# Altium PCB PCB图.PcbDoc
Units mil, origin at the board's own origin, x right, y up, seen from the top; angles counter-clockwise.
Board outline 6000 x 4000 mil, 2 copper layers (Top Layer, Bottom Layer); 32 components, 39 nets, 182 pads, 0 vias.
Unrouted connection lines stored in the file: 107.
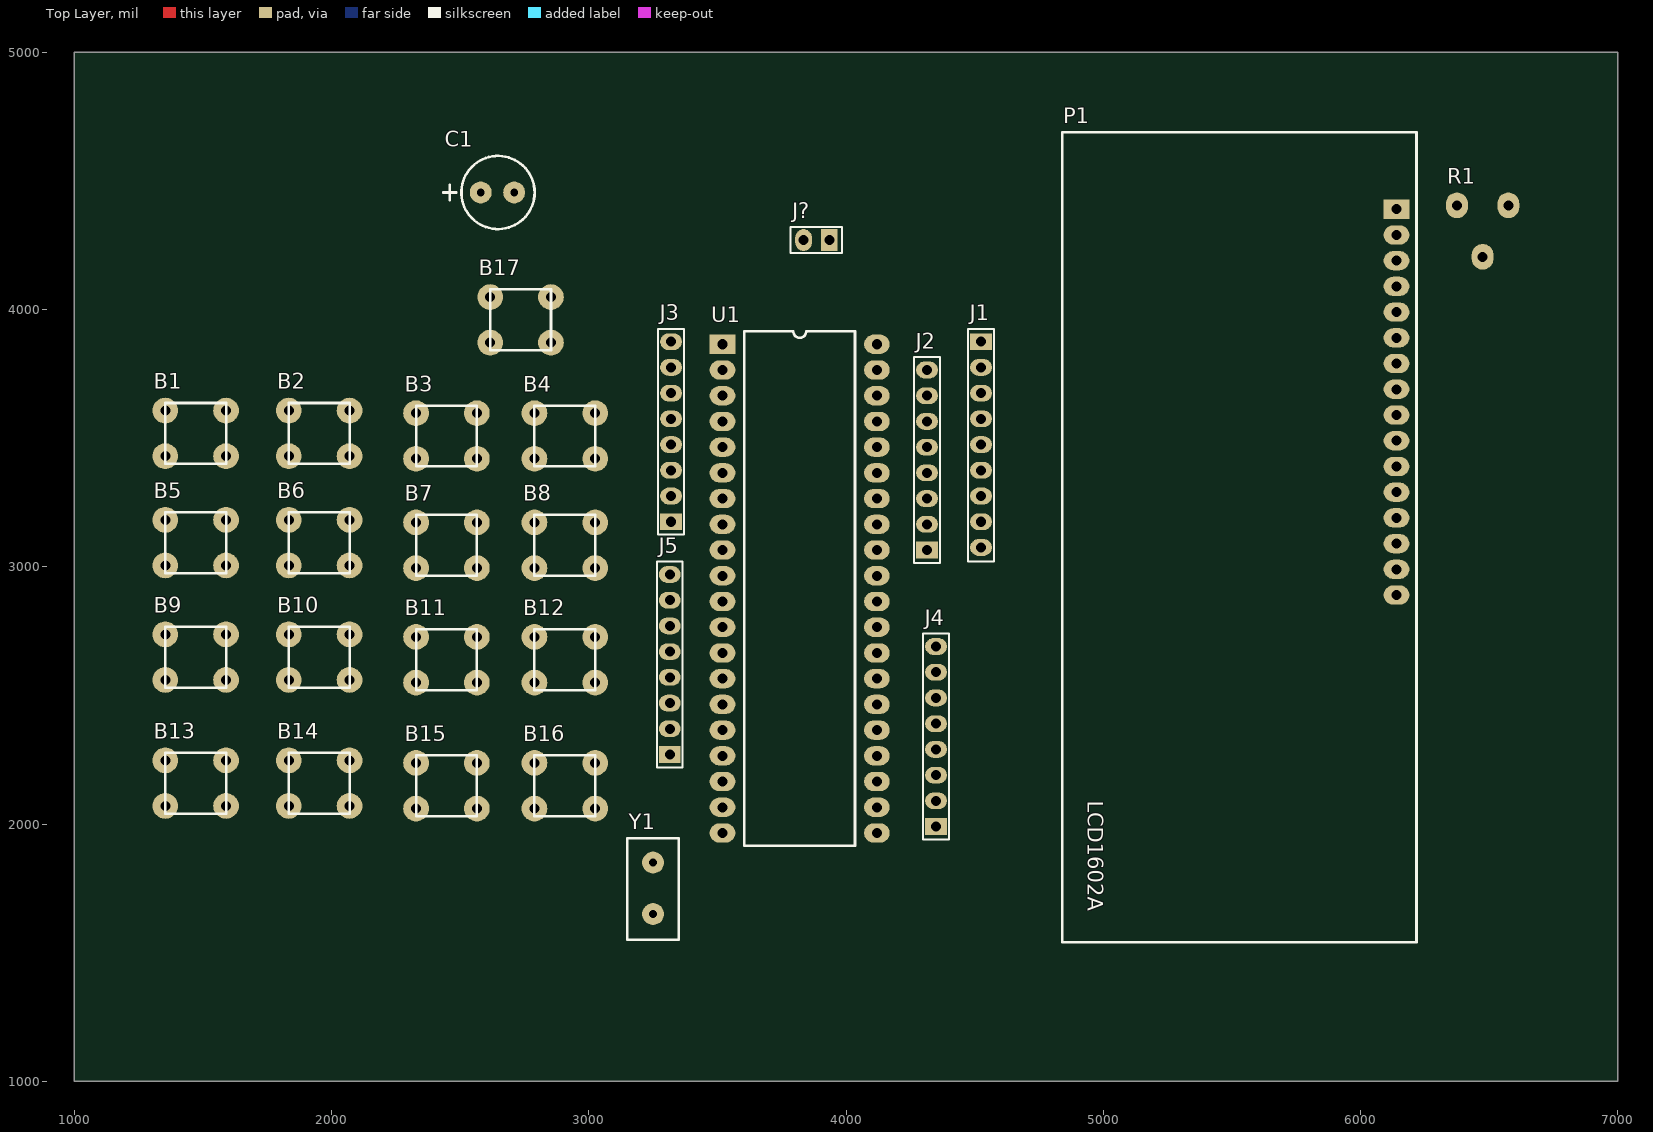
[diagram p0: Top Layer view]
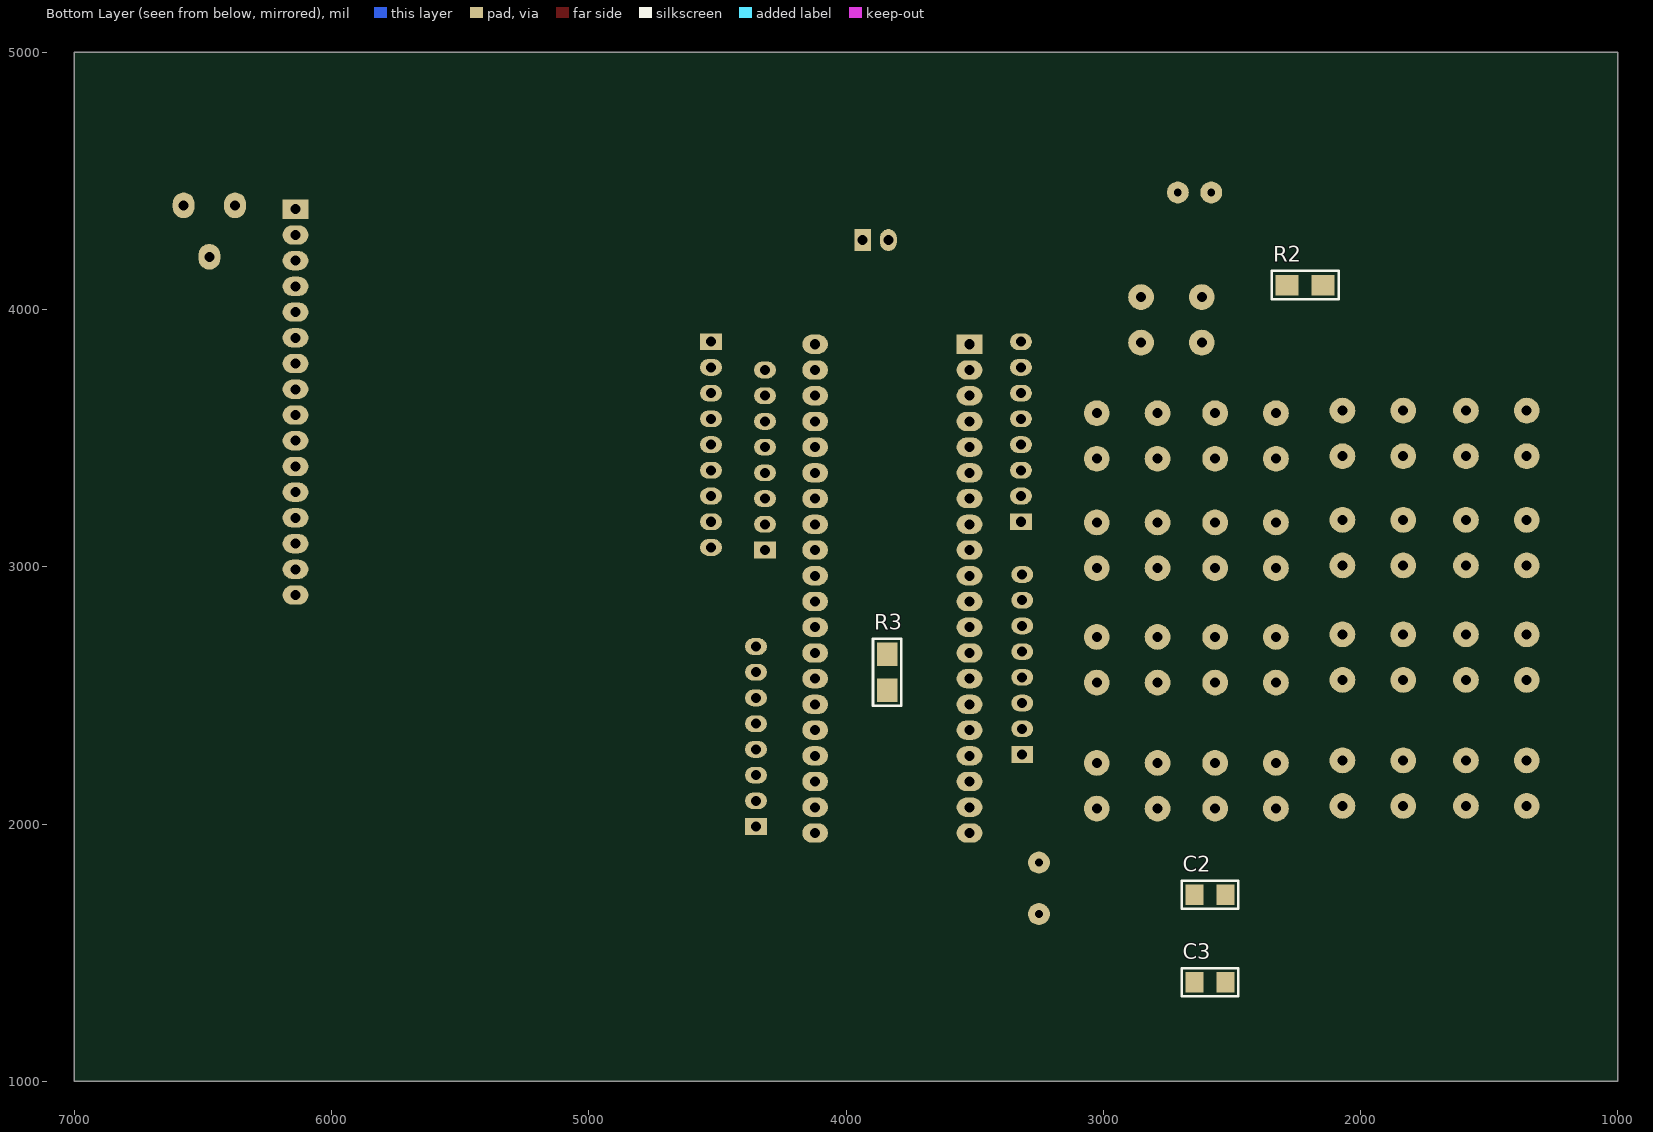
[diagram p1: Bottom Layer view, seen from below]

## Layer stack, top to bottom
Top Solder: solder mask 0.4, Solder Resist, Dk 3.5
Top Layer: signal copper 1.4
Dielectric 1: dielectric 12.6, FR-4, Dk 4.8
Bottom Layer: signal copper 1.4
Bottom Solder: solder mask 0.4, Solder Resist, Dk 3.5

## Board outline
1000,1000 7000,1000 7000,5000 1000,5000

## Design rules (kind name [scope] priority, off if disabled: settings)
Clearance [All] p1: gap=10
PolygonConnect [All] p1: connectstyle=Relief reliefconductorwidth=10 reliefentries=4 polygonreliefangle="90 Angle" airgapwidth=10
RoutingVias [All] p1: holewidth=28 width=50 viastyle="Through Hole" minholewidth=28 minwidth=50 maxholewidth=28 maxwidth=50
SolderMaskExpansion [All] p1: expansion=4
Width [All] p1: maxlimit=40 minlimit=20 preferedwidth=20
29 further rules are at their usual default settings.

## Components (designator, comment, footprint, x,y, rotation, side; value= is the part's Value field where it differs from the comment)
B1 "SW-Button-Z" SW-PB-Z 1471.89,3518.58 r0 top
B2 "SW-Button-Z" SW-PB-Z 1951.89,3518.58 r0 top
B3 "SW-Button-Z" SW-PB-Z 2446.89,3508.58 r0 top
B4 "SW-Button-Z" SW-PB-Z 2906.89,3508.58 r0 top
B5 "SW-Button-Z" SW-PB-Z 1471.89,3093.58 r0 top
B6 "SW-Button-Z" SW-PB-Z 1951.89,3093.58 r0 top
B7 "SW-Button-Z" SW-PB-Z 2446.89,3083.58 r0 top
B8 "SW-Button-Z" SW-PB-Z 2906.89,3083.58 r0 top
B9 "SW-Button-Z" SW-PB-Z 1471.89,2648.58 r0 top
B10 "SW-Button-Z" SW-PB-Z 1951.89,2648.58 r0 top
B11 "SW-Button-Z" SW-PB-Z 2446.89,2638.58 r0 top
B12 "SW-Button-Z" SW-PB-Z 2906.89,2638.58 r0 top
B13 "SW-Button-Z" SW-PB-Z 1471.89,2158.58 r0 top
B14 "SW-Button-Z" SW-PB-Z 1951.89,2158.58 r0 top
B15 "SW-Button-Z" SW-PB-Z 2446.89,2148.58 r0 top
B16 "SW-Button-Z" SW-PB-Z 2906.89,2148.58 r0 top
B17 "SW-Button-Z" SW-PB-Z 2735,3960 r0 top
C1 "CAP+DIP" CAP+DIP 2645,4455 r0 top
C2 "CAP" CAP 2590,1725 r180 bottom
C3 "CAP" CAP 2590,1385 r180 bottom
J1 "Header1x9" HEADER1X9 4525,3475 r270 top
J2 "Header1x8" HEADER1X8 4315,3410 r90 top
J3 "Header1x8" HEADER1X8 3320,3520 r90 top
J4 "Header1x8" HEADER1X8 4350,2335 r90 top
J5 "Header1x8" HEADER1X8 3315,2615 r90 top
J? "Header1x2" HEADER1X2 3885,4270 r180 top
P1 "LCD1602A" LCD1602A 5540,3090 r270 top
R1 "RES" RES-Change-T 6475,4305 r180 top
R2 "RES" RES 2215,4095 r180 bottom
R3 "RES" RES 3840,2590 r90 bottom
U1 "89C51/52" DIP-40 3805,2920 r0 top
Y1 "XTAL" XTAL 3245,1750 r90 top

## Footprints (in the part's own frame and the unit in brackets; to place one, negate y for a bottom-side part, rotate by r counter-clockwise, add the part's x,y. Pads: shape width x height; smd on the part's side, far side on the other; paste and mask are expansions set on the pad)
CAP [mil]
  rect 70x80 smd: 1(-55,0) 2(65,0)
  silkscreen extent -105,-55 115,55
CAP+DIP [mil]
  round 85 hole 30: 1(-65,0) 2(65,0)
  silkscreen extent -210,-142 145,142
DIP-40 [mil]
  rect 100x75 hole 39: 1(-285,945)
  oval 100x75 hole 39: 2(-285,845) 3(-285,745) 4(-285,645) 5(-285,545) 6(-285,445) 7(-285,345) 8(-285,245) 9(-285,145) 10(-285,45) 11(-285,-55) 12(-285,-155) 13(-285,-255) 14(-285,-355) 15(-285,-455) 16(-285,-555) 17(-285,-655) 18(-285,-755) 19(-285,-855) 20(-285,-955) 21(315,-955) 22(315,-855) 23(315,-755) 24(315,-655) 25(315,-555) 26(315,-455) 27(315,-355) 28(315,-255) 29(315,-155) 30(315,-55) 31(315,45) 32(315,145) 33(315,245) 34(315,345) 35(315,445) 36(315,545) 37(315,645) 38(315,745) 39(315,845) 40(315,945)
  silkscreen extent -200,-1005 230,995
HEADER1X2 [mil]
  rect 65x85 hole 39: 1(-50,0)
  oval 65x85 hole 39: 2(50,0)
  silkscreen extent -100,-50 100,50
HEADER1X8 [mil]
  rect 65x85 hole 39: 1(-345,0)
  oval 65x85 hole 39: 2(-245,0) 3(-145,0) 4(-45,0) 5(55,0) 6(155,0) 7(255,0) 8(355,0)
  silkscreen extent -395,-50 405,50
HEADER1X9 [mil]
  rect 65x85 hole 39: 1(-400,0)
  oval 65x85 hole 39: 2(-300,0) 3(-200,0) 4(-100,0) 5(0,0) 6(100,0) 7(200,0) 8(300,0) 9(400,0)
  silkscreen extent -450,-50 455,50
LCD1602A [mil]
  rect 75x100 hole 39: 1(-1300,600)
  oval 75x100 hole 39: 2(-1200,600) 3(-1100,600) 4(-1000,600) 5(-900,600) 6(-800,600) 7(-700,600) 8(-600,600) 9(-500,600) 10(-400,600) 11(-300,600) 12(-200,600) 13(-100,600) 14(0,600) 15(100,600) 16(200,600)
  silkscreen extent -1600,-700 1550,678
RES [mil]
  rect 90x80 smd: 1(-70,0) 2(70,0)
  silkscreen extent -130,-55 130,55
RES-Change-T [mil]
  oval 85x100 hole 39: 1(-100,-100) 2(100,-100) 3(0,100)
SW-PB-Z [mm]
  round 2.54 hole 0.991: 1(-3,2.25) 2(3,-2.25) ""(-3,-2.25) ""(3,2.25)
  silkscreen extent -3,-3 3,3
XTAL [mil]
  round 85 hole 30: 1(-100,-5) 2(100,-5)
  silkscreen extent -200,-105 195,95

## Part data
R1: library part RES-Change-T

## Nets (pads, with @x,y where several pads share a name; then routed paths per layer and width w, separated by ;. In a path a pad name is that pad's centre, name@x,y a point inside that pad or via, vN(x,y) a via of type N, cw(c..) or ccw(c..) an arc to the next point about the centre after c; other vN are vias at no path point)
EN: J4.6 P1.6 U1.26
GND: C2.1 C3.1 J?.2 P1.1 P1.16 R1.2 R3.1 U1.20
NetB17_1: B17.1 R2.2
NetB17_2: B17.2 C1.2 R3.2 U1.9
NetC2_2: C2.2 U1.18 Y1.2
NetC3_2: C3.2 U1.19 Y1.1
P00: J1.2 J2.8 P1.7 U1.39
P01: J1.3 J2.7 P1.8 U1.38
P02: J1.4 J2.6 P1.9 U1.37
P03: J1.5 J2.5 P1.10 U1.36
P04: J1.6 J2.4 P1.11 U1.35
P05: J1.7 J2.3 P1.12 U1.34
P06: J1.8 J2.2 P1.13 U1.33
P07: J1.9 J2.1 P1.14 U1.32
P10: J3.8 U1.1
P11: J3.7 U1.2
P12: J3.6 U1.3
P13: J3.5 U1.4
P14: J3.4 U1.5
P15: J3.3 U1.6
P16: J3.2 U1.7
P17: J3.1 U1.8
P20: J4.8 P1.4 U1.28
P21: J4.7 P1.5 U1.27
P23: J4.5 U1.25
P24: J4.4 U1.24
P25: J4.3 U1.23
P26: J4.2 U1.22
P27: J4.1 U1.21
P30: B1.2 B2.2 B3.2 B4.2 J5.8 U1.10
P31: B5.2 B6.2 B7.2 B8.2 J5.7 U1.11
P32: B9.2 B10.2 B11.2 B12.2 J5.6 U1.12
P33: B13.2 B14.2 B15.2 B16.2 J5.5 U1.13
P34: B4.1 B8.1 B12.1 B16.1 J5.4 U1.14
P35: B3.1 B7.1 B11.1 B15.1 J5.3 U1.15
P36: B2.1 B6.1 B10.1 B14.1 J5.2 U1.16
P37: B1.1 B5.1 B9.1 B13.1 J5.1 U1.17
VCC: C1.1 J1.1 J?.1 P1.2 P1.15 R2.1 U1.31 U1.40
VO: P1.3 R1.1 R1.3
pads on no net: B1. B2. B3. B4. B5. B6. B7. B8. B9. B10. B11. B12. B13. B14. B15. B16. B17. U1.29 U1.30